# Altium PCB 7.09寸6色墨水屏.PcbDoc
Units mil, origin at the board's own origin, x right, y up, seen from the top; angles counter-clockwise.
Board outline 1424.8 x 1574.8 mil, 2 copper layers (Top Layer, Bottom Layer), stack 65.32 mil thick; 76 components, 61 nets, 235 pads, 282 vias.
Unrouted connection lines stored in the file: 32.
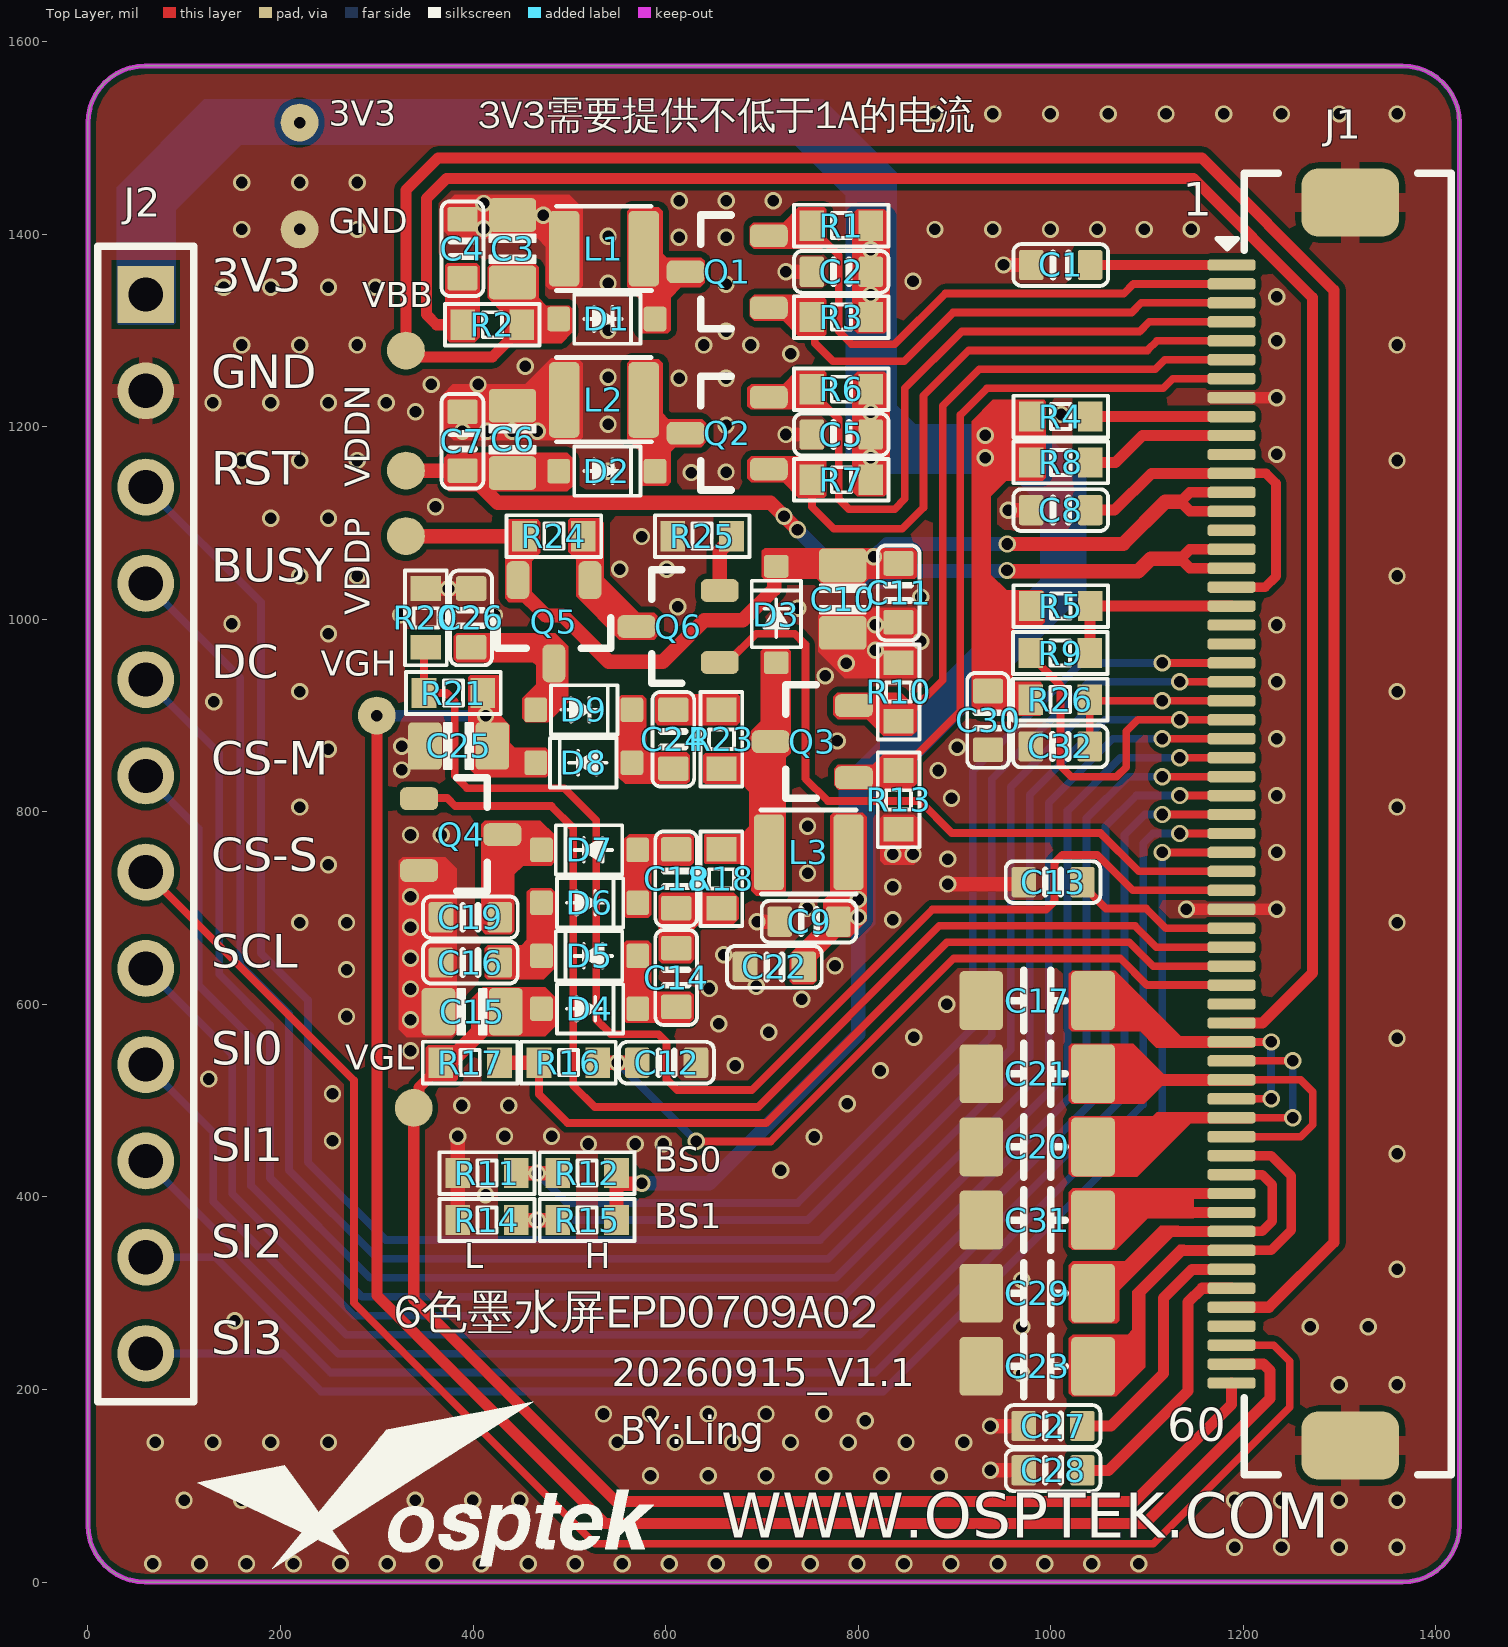
[diagram p0: Top Layer view]
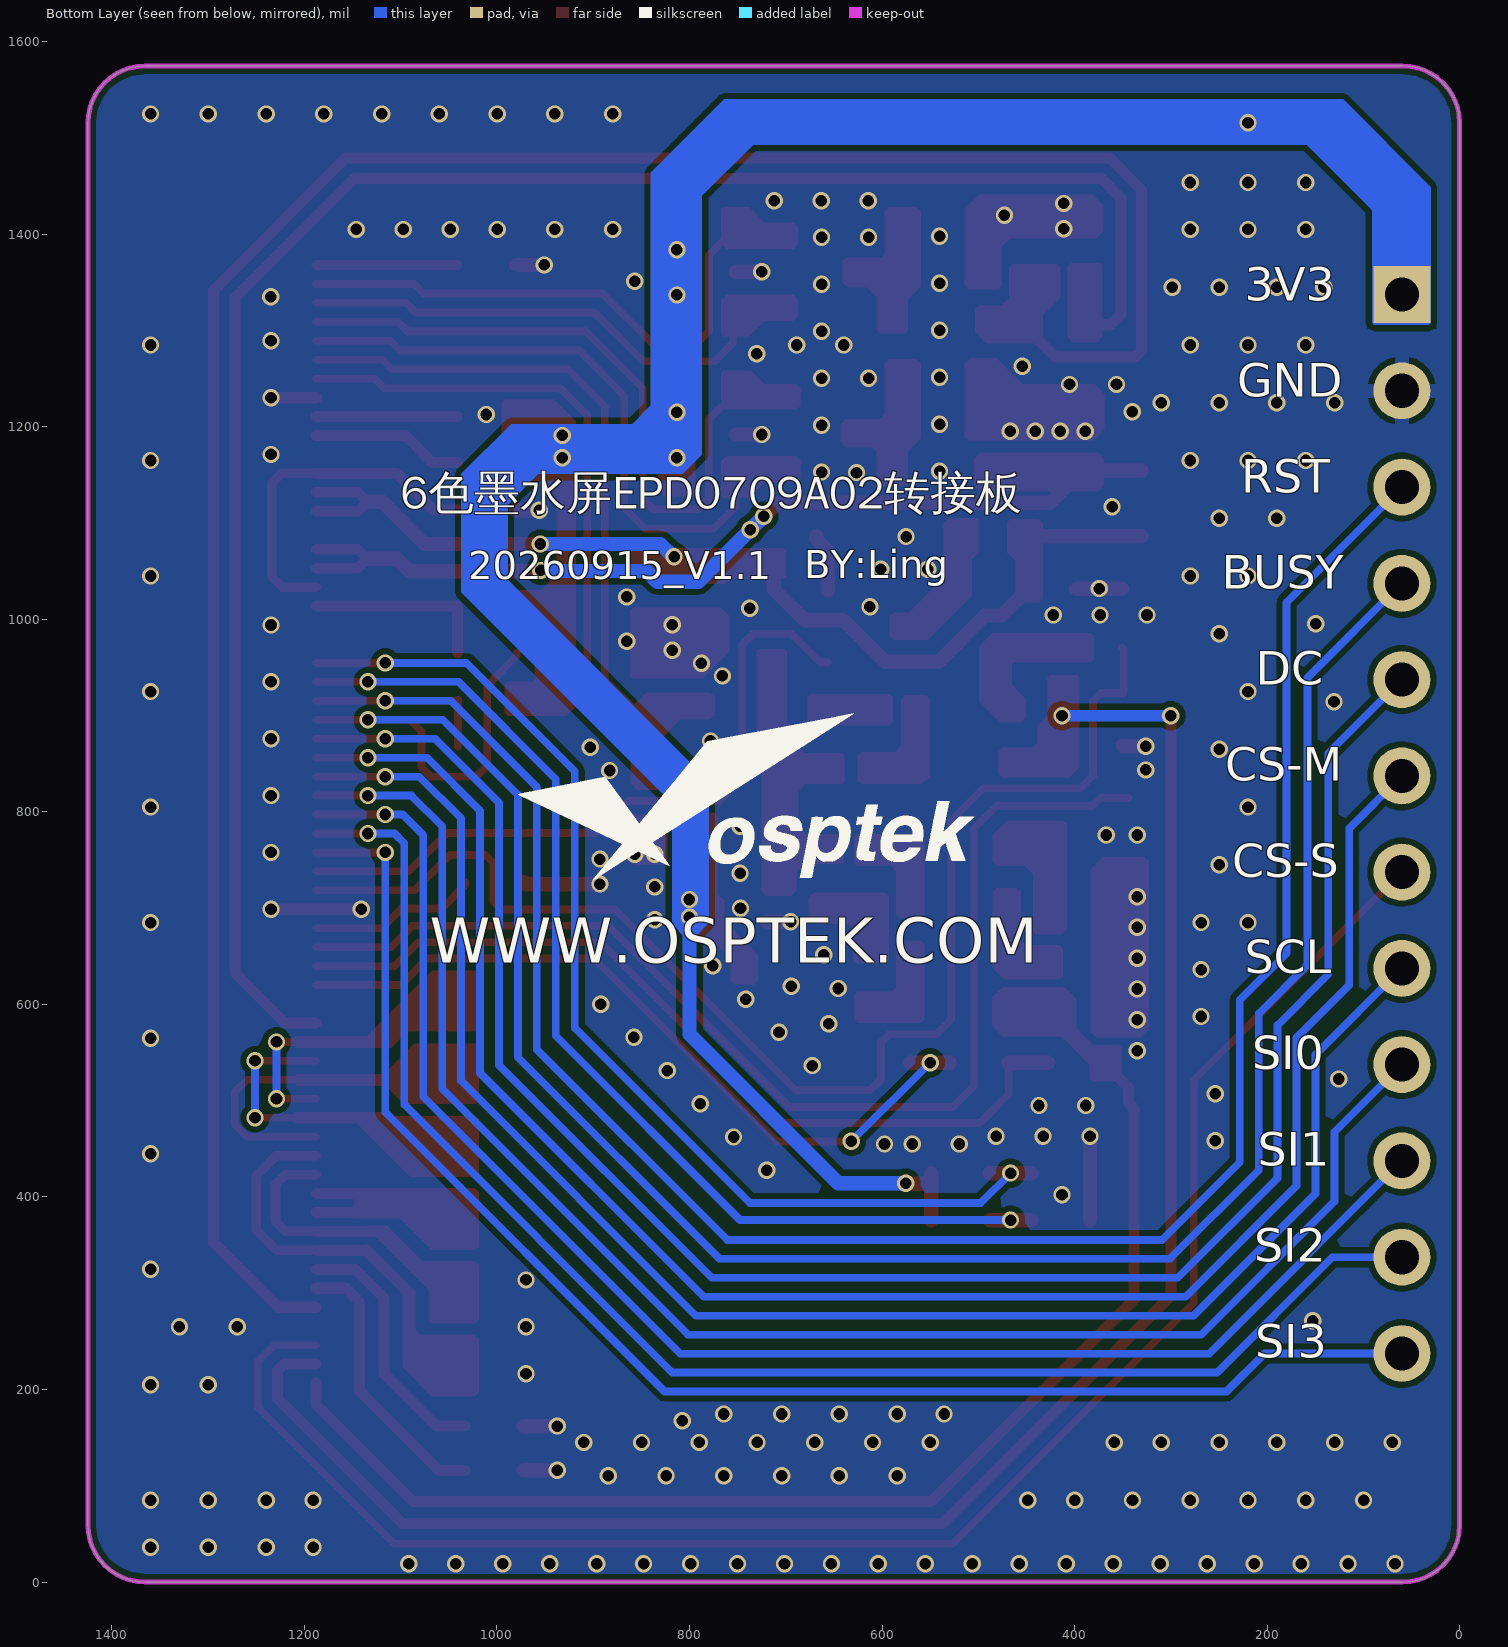
[diagram p1: Bottom Layer view, seen from below]

## Layer stack, top to bottom
Top Solder: solder mask 0.4, Solder Resist, Dk 3.5
Top Layer: signal copper 1.4
Dielectric 1: dielectric 62.5197, FR-4, Dk 4.8
Bottom Layer: signal copper 1.4
Bottom Solder: solder mask 0.4, Solder Resist, Dk 3.5

## Board outline
0,59.06 ccw(c59.06,59.06) 59.06,0 1365.75,0 ccw(c1365.75,59.06) 1424.8,59.06 1424.8,1515.75 ccw(c1365.75,1515.75) 1365.75,1574.8 59.06,1574.8 ccw(c59.06,1515.75) 0,1515.75

## Design rules (kind name [scope] priority, off if disabled: settings)
Clearance [All] p1: gap=6 ignorepadtopadclearanceinfootprint=TRUE except(0: Arc-Hole Track-Hole SMDPad-Hole THPad-Hole Via-Hole Fill-Hole Poly-Hole Region-Hole Text-Hole)
ComponentClearance [All] p1: gap=0 collisioncheckmode=3 verticalgap=0 showdistances=FALSE
HoleToHoleClearance [All] p1: gap=4 allowstackedmicrovias=TRUE
MinimumSolderMaskSliver [All] p1: minsoldermaskwidth=0
PlaneConnect [All] p1: pad.planeconnectstyle=Relief pad.reliefexpansion=20 pad.reliefentries=4 pad.reliefconductorwidth=10 pad.reliefairgap=10 via.planeconnectstyle=Direct via.reliefexpansion=20 via.reliefentries=4 via.reliefconductorwidth=10 via.reliefairgap=10
PolygonConnect [All] p1: thpad.connectstyle=Relief thpad.reliefconductorwidth=15 thpad.reliefentries=4 thpad.polygonreliefangle="90 Angle" thpad.airgapwidth=6 smdpad.connectstyle=Direct smdpad.reliefconductorwidth=10 smdpad.reliefentries=4 smdpad.polygonreliefangle="90 Angle" smdpad.airgapwidth=10 via.connectstyle=Direct via.reliefconductorwidth=10 via.reliefentries=4 via.polygonreliefangle="90 Angle" via.airgapwidth=10
RoutingVias [All] p1: holewidth=28 width=50 viastyle="Through Hole" minholewidth=11 minwidth=18 maxholewidth=28 maxwidth=50
SilkToSilkClearance [All] p1: silktosilkclearance=0
SilkToSolderMaskClearance [IsPad] p1: minsilkscreentomaskgap=0 clearancetoexposedcopper=TRUE
SolderMaskExpansion [All] p1: expansion=4 istentingtop=FALSE
Width [All] p1: maxlimit=100 minlimit=6 preferedwidth=6
24 further rules are at their usual default settings.

## Components (designator, comment, footprint, x,y, rotation, side; value= is the part's Value field where it differs from the comment)
C1 "25V/470nF" 0603-C 1010.47,1368.11 r180 top
C2 "22uF" 0603-C 782.53,1361 r0 top
C3 "25V 10uF" 0805-C 441,1385 r270 top
C4 "0.1uF" 0603-C 389,1385 r270 top
C5 "22uF" 0603-C 782.53,1192 r0 top
C6 "25V 10uF" 0805-C 441,1187 r270 top
C7 "0.1uF" 0603-C 389,1185 r270 top
C8 "22uF" 0603-C 1010.47,1113.46 r180 top
C9 "22uF" 0603-C 749,686 r0 top
C10 "25V 10uF" 0805-C 784,1021 r90 top
C11 "0.1uF" 0603-C 842,1027.53 r90 top
C12 "50V 1uF" 0603-C 601,539.47 r0 top
C13 "25V/470nF" 0603-C 1002.47,727 r180 top
C14 "25V/470nF" 0603-C 611,627.95 r90 top
C15 "50V 10uF" 0805-C 399,592.47 r0 top
C16 "50V 1uF" 0603-C 397.19,643.47 r0 top
C17 "25V/47uF" "1206/3216 C3" 985.95,604 r180 top
C18 "25V/470nF" 0603-C 611,730.47 r270 top
C19 "47nF" 0603-C 397.19,690.47 r0 top
C20 "25V/47uF" "1206/3216 C3" 985.95,452 r180 top
C21 "25V/47uF" "1206/3216 C3" 985.95,528 r180 top
C22 "22uF" 0603-C 713,639 r0 top
C23 "25V/47uF" "1206/3216 C3" 985.95,224 r180 top
C24 "25V/470nF" 0603-C 608,875.47 r90 top
C25 "25V 10uF" 0805-C 385,868.47 r0 top
C26 "25V/470nF" 0603-C 398,1001.47 r270 top
C27 "25V/470nF" 0603-C 1002.47,162 r180 top
C28 "25V/4.7uF" 0603-C 1002.47,116 r180 top
C29 "25V/47uF" "1206/3216 C3" 985.95,300 r180 top
C30 "22uF" 0603-C 935,895 r270 top
C31 "25V/47uF" "1206/3216 C3" 985.95,376 r180 top
C32 "0.1uF" 0603-C 1010,868 r0 top
D1 "SD103AWS" SOD-323 539,1312 r0 top
D2 "SD103AWS" SOD-323 539,1154 r0 top
D3 "SD103AWS" SOD-323 715,1005 r90 top
D4 "SD103AWS" SOD-323 521,595.47 r0 top
D5 "SD103AWS" SOD-323 521,650.42 r180 top
D6 "SD103AWS" SOD-323 521,705.53 r0 top
D7 "SD103AWS" SOD-323 521,760.47 r180 top
D8 "SD103AWS" SOD-323 515,851 r180 top
D9 "SD103AWS" SOD-323 515,906 r0 top
J1 "EPD0709A02" FPC0.5-60P 1254.8,787.4 r90 top locked
J2 "Pin HDR1X12" "Pin HDR1X12/2.54mm-S" 60,1337.4 r270 top locked
L1 "10uH" IND_CB2518_MM 536,1385 r0 top
L2 "10uH" IND_CB2518_MM 536,1228 r0 top
L3 "10uH" IND_CB2518_MM 748.66,758 r0 top
Q1 "AO3401" SOT-23-3 664,1361 r180 top
Q2 "AO3401" SOT-23-3 664,1193.4 r180 top
Q3 "AO3400" SOT-23-3 752.41,873 r180 top
Q4 "MMBT3904" SOT-23-3 387.25,776.4 r0 top
Q5 "MMBT3906" SOT-23-3 484,997.47 r270 top
Q6 "AO3400" SOT-23-3 613,992.53 r180 top
R1 "0.2R" 0603-R 782.54,1409 r0 top
R2 "0R" 0603-R 420,1306 r0 top
R3 "1M" 0603-R 782.54,1314 r0 top
R4 "0R" 0603-R 1010.47,1210.63 r180 top
R5 "0R" 0603-R 1010.47,1013.78 r180 top
R6 "0.2R" 0603-R 782.54,1239 r0 top
R7 "1M" 0603-R 782.54,1145 r0 top
R8 "0R" 0603-R 1010.47,1163 r180 top
R9 "10K" 0603-R 1010,965 r180 top
R10 "0.2R" 0603-R 842,924.53 r90 top
R11 "NC" 0603-R 414.47,424.79 r0 top
R12 "0R" 0603-R 518.47,424.79 r0 top
R13 "1M" 0603-R 842.02,812.47 r270 top
R14 "NC" 0603-R 414.47,376 r0 top
R15 "0R" 0603-R 518.47,376 r0 top
R16 "16K" 0603-R 499.01,539.47 r0 top
R17 "402K" 0603-R 396.99,539.47 r0 top
R18 "2.2R" 0603-R 658,730.47 r90 top
R20 "4.3K" 0603-R 351,1001.47 r90 top
R21 "110K" 0603-R 379.53,923.47 r180 top
R23 "2.2R" 0603-R 658,875.47 r270 top
R24 "100K" 0603-R 484,1086.47 r180 top
R25 "1.5K" 0603-R 638,1086.48 r0 top
R26 "10K" 0603-R 1010,916.62 r180 top

## Footprints (in the part's own frame and the unit in brackets; to place one, negate y for a bottom-side part, rotate by r counter-clockwise, add the part's x,y. Pads: shape width x height; smd on the part's side, far side on the other; paste and mask are expansions set on the pad)
0603-C [mm] "Murata & TDK 0603,25V,±10%,X7R,SERAMIC"
  rrect20% 0.65x0.8 smd paste+0 mask+0.051: 1(-0.775,0) 2(0.775,0)
  silkscreen extent -1.25,-0.55 1.25,0.55, body extent -0.8,-0.41 0.8,0.39, height 0.81
0603-R [mm]
  rect 0.65x0.8 smd paste+0 mask+0.051: 1(-0.775,0) 2(0.775,0)
  silkscreen extent -1.25,-0.55 1.25,0.55, body extent -0.8,-0.4 0.8,0.4, height 0.45
0805-C [mil]
  rrect25% 35x49.21 smd mask+0.5: 1(-35,0) 2(35,0)
  silkscreen extent -15,-24 15,24, body extent -39,-25 39,25, height 40
"1206/3216 C3" [mm]
  rrect20% 1.15x1.55 smd mask+0.051: 1(-1.475,0) 2(1.475,0)
  silkscreen extent -0.73,-0.8 0.73,0.8, body extent -1.6,-0.8 1.6,0.8, height 1.61
FPC0.5-60P [mm]
  rrect50% 1.8x2.58 smd: 0(-16.4,-1.432) 0(16.4,-1.432)
  rrect50% 0.3x1.27 smd mask+0.051: 1(14.75,1.7) 2(14.25,1.7) 3(13.75,1.7) 4(13.25,1.7) 5(12.75,1.7) 6(12.25,1.7) 7(11.75,1.7) 8(11.25,1.7) 9(10.75,1.7) 10(10.25,1.7) 11(9.75,1.7) 12(9.25,1.7) 13(8.75,1.7) 14(8.25,1.7) 15(7.75,1.7) 16(7.25,1.7) 17(6.75,1.7) 18(6.25,1.7) 19(5.75,1.7) 20(5.25,1.7) 21(4.75,1.7) 22(4.25,1.7) 23(3.75,1.7) 24(3.25,1.7) 25(2.75,1.7) 26(2.25,1.7) 27(1.75,1.7) 28(1.25,1.7) 29(0.75,1.7) 30(0.25,1.7) 31(-0.25,1.7) 32(-0.75,1.7) 33(-1.25,1.7) 34(-1.75,1.7) 35(-2.25,1.7) 36(-2.75,1.7) 37(-3.25,1.7) 38(-3.75,1.7) 39(-4.25,1.7) 40(-4.75,1.7) 41(-5.25,1.7) 42(-5.75,1.7) 43(-6.25,1.7) 44(-6.75,1.7) 45(-7.25,1.7) 46(-7.75,1.7) 47(-8.25,1.7) 48(-8.75,1.7) 49(-9.25,1.7) 50(-9.75,1.7) 51(-10.25,1.7) 52(-10.75,1.7) 53(-11.25,1.7) 54(-11.75,1.7) 55(-12.25,1.7) 56(-12.75,1.7) 57(-13.25,1.7) 58(-13.75,1.7) 59(-14.25,1.7) 60(-14.75,1.7)
  silkscreen extent -17.17,-4.1 17.17,2.09, body extent -17.1,-4.19 17.1,2.01, height 2.01
IND_CB2518_MM [mm]
  rrect30% 0.8x2 smd mask+0.051: 1(-1.05,0) 2(1.05,0)
  silkscreen extent -1.26,-1.1 1.25,1.12, body extent -1.25,-0.9 1.25,0.9, height 0.85
"Pin HDR1X12/2.54mm-S" [mm] "Connector; Header; 12 Position"
  rect 1.5x1.5 hole 0.9: 1(0,0)
  round 1.5 hole 0.9: 2(2.54,0) 3(5.08,0) 4(7.62,0) 5(10.16,0) 6(12.7,0) 7(15.24,0) 8(17.78,0) 9(20.32,0) 10(22.86,0) 11(25.4,0) 12(27.94,0)
  silkscreen extent -1.27,-1.27 29.21,1.27, body extent -1.27,-1.27 29.21,1.27, height 7.58
SOD-323 [mm] "塑封二极管"
  rrect25% 0.6x0.65 smd mask+0.051: 1(-1.27,0) 2(1.27,0)
  silkscreen extent -0.86,-0.65 0.89,0.65, body extent -1.25,-0.63 1.25,0.62, height 1
SOT-23-3 [mm]
  rrect50% 1x0.6 smd mask+0.051: 1(-1.099,0.95) 2(-1.099,-0.95) 3(1.098,0)
  silkscreen extent -0.1,-1.5 0.7,1.5, body extent -1.2,-1.5 1.2,1.5, height 1.05

## Part data
C1 C2 C3 C4 C5 C6 C7 C8 C9 C10 C11 C12 C13 C14 C15 C16 C17 C18 C19 C20 C21 C22 C23 C24 C25 C26 C27 C28 C29 C30 C31 C32: library part CAP, "Capacitor"
D1 D2 D3 D4 D5 D6 D7 D8 D9: library part DSK110
L1 L2 L3: library part INDUCTOR, "INDUCTOR"
Q1 Q2: "P沟道 30V/4.2A"
Q3 Q6: "N沟道 30V/4.2A"
Q4: library part NPN, "NPN Bipolar Transistor", Code_JEDEC=TO-226-AA, LatestRevisionDate=17-Jul-2002, LatestRevisionNote="Re-released for DXP Platform.", PackageDescription="TO, Flat Index; 3 In-Line, Axial Leads; Body Dia. 4.8mm; Leads 0.55 x 0.51 mm (max)", PackageReference=TO-226-AA, Published=8-Jun-2000, Publisher="Altium Limited"
Q5: library part PNP, "NPN Bipolar Transistor", Code_JEDEC=TO-226-AA, LatestRevisionDate=17-Jul-2002, LatestRevisionNote="Re-released for DXP Platform.", PackageDescription="TO, Flat Index; 3 In-Line, Axial Leads; Body Dia. 4.8mm; Leads 0.55 x 0.51 mm (max)", PackageReference=TO-226-AA, Published=8-Jun-2000, Publisher="Altium Limited"
R1 R2 R3 R4 R5 R6 R7 R8 R9 R10 R11 R12 R13 R14 R15 R16 R17 R18 R20 R21 R23 R24 R25 R26: library part Res2, "Resistor"

## Free pads (board coordinates)
  round 39.37 smd mask+2: 2(219.8,1405) 2(219.8,1516) 2(300,900) 2(330.28,1086.47) 2(330.28,1154.47) 2(330.28,1279.19) 2(338.41,492.49)

## Via types
v1: diameter 18, hole 12, Top Layer to Bottom Layer, tented both sides, 282 vias

## Nets (pads, with @x,y where several pads share a name; then routed paths per layer and width w, separated by ;. In a path a pad name is that pad's centre, name@x,y a point inside that pad or via, vN(x,y) a via of type N, cw(c..) or ccw(c..) an arc to the next point about the centre after c; other vN are vias at no path point)
+3V3: C2.2 C5.2 C9.2 C22.2 C30.1 J2.1 L3.2 pad.2@219.8,1516 R1.2 R3.2 R4.2 R5.2 R6.2 R7.2 R8.2 R12.2 R15.2 R26.2 | length 505.2
  Top Layer w15: R15.2 R12.2@549,411 ; R12.2 R12.2@549,411 ; v1(575.45,414.38) 574.87,413.81 551.81,413.81 R12.2@549,411
  Bottom Layer w15: v1(575.45,414.38) 645.38,414.38 800,569 v1(800,690.72) v1(800,709)
  other v1: 813,1168 932,1168 932,1191 813,1215 813,1337 813,1384 219.8,1516
AVDD: J1.9 R4.1 | length 146.9
  Top Layer w11.5: R4.1 J1.9
BS0: J1.22 R11.2 R12.1 | length 1165.7
  Top Layer w8: v1(1116,954.72) J1.22
  Top Layer w15: R11.2 v1(466.47,424.79) R12.1
  Bottom Layer w8: v1(466.47,424.79) 497.5,393.76 737.35,393.76 919.15,575.55 919.15,842.14 1031.73,954.72 v1(1116,954.72)
BS1: J1.23 R14.2 R15.1 | length 1152.1
  Top Layer w8: v1(1134,935.04) J1.23
  Top Layer w15: R14.2 v1(466.47,376) R15.1
  Bottom Layer w8: v1(466.47,376) 747.47,376 938.84,567.37 938.84,833.99 1039.89,935.04 v1(1134,935.04)
BUSY_N: J1.25 J2.4 R9.2 | length 2385
  Top Layer w8: R9.2 979.47,962.05 1010.21,931.31 1010.21,847.78 1021.55,836.44 1068.44,836.44 1078.45,846.45 1078.45,883.76 1090.36,895.67 v1(1134,895.67) J1.25
  Bottom Layer w8: J2.4 158.05,939.35 158.05,641.22 208.76,590.5 208.76,427.83 300.93,335.67 768.82,335.67 978.21,545.05 978.21,817.68 1056.19,895.67 v1(1134,895.67)
CSB_M: J1.27 J2.6 | length 1929.1
  Top Layer w8: v1(1134,856.3) J1.27
  Bottom Layer w8: J2.6 114.72,782.68 114.72,620.18 169.39,565.5 169.39,411.53 284.62,296.3 785.13,296.3 1017.58,528.74 1017.58,801.37 1072.5,856.3 v1(1134,856.3)
CSB_S: J1.58 J2.7 | length 1786.8
  Top Layer w8: J2.7 276.22,521.18 276.22,289.96 526.51,39.67 1106.61,39.67 1248.39,181.45 1248.39,229.23 1231.56,246.06 J1.58
DC_X: J1.26 J2.5 | length 2004.6
  Top Layer w8: v1(1116,875.98) J1.26
  Bottom Layer w8: J2.5 136.38,861.02 136.38,631.2 189.08,578.5 189.08,419.68 292.77,315.98 776.98,315.98 997.89,536.89 997.89,809.53 1064.35,875.98 v1(1116,875.98)
DRVN: J1.37 Q4.1 | length 1220.9
  Top Layer w8: Q4.1@343.82,814.4 373.14,814.4 381.55,806 481.4,806 504.19,783.22 504.19,515.62 526.4,493.41 696.11,493.41 884.3,681.6 1087.56,681.6 1109.71,659.45 J1.37
DRVN2: J1.40
DRVP_G: J1.33 Q6.1 | length 727.8
  Top Layer w8: Q6.1 664.12,955.13 694.05,985.06 734.01,985.06 745.25,973.82 745.25,834.59 768.46,811.39 864,811.39 897.31,778.07 1051.71,778.07 1091.59,738.19 J1.33
FBN: J1.38 R16.1 R17.2 | length 893.7
  Top Layer w8: R16.1 468.48,506.52 498.17,476.83 704.43,476.83 892.28,664.69 1081.72,664.69 1106.65,639.76 J1.38
  Top Layer w15: R17.2 R16.1
FBP: J1.34 R20.1 R21.2 | length 1386.9
  Top Layer w8: R20.1 349,968.95 R21.2 372.44,923.47 380.88,915.04 380.88,837.55 393.8,824.63 494.63,824.63 528.02,791.23 528.02,584.33 543.35,569 592.67,569 601,560.67 601,522 612,511 689.57,511 877.09,698.52 995.15,698.52 1003.98,707.35 1003.98,746.98 1012.27,755.27 1048.54,755.27 1085.31,718.5 J1.34
GDRC: J1.3 Q1.1 R3.1 | length 494.2
  Top Layer w8: R3.1 754.86,1311.15 754.86,1287.05 773.92,1267.99 847.92,1267.99 898.64,1318.71 1084.21,1318.71 1094.24,1328.74 J1.3
GDRN: J1.5 Q2.1 R7.1 | length 622.6
  Top Layer w8: R7.1 752.01,1116.87 774.86,1094.02 845.89,1094.02 867.81,1115.95 867.81,1232.37 914.79,1279.34 1100.52,1279.34 1110.55,1289.37 J1.5
GDRP: J1.7 Q3.1 R13.1 | length 694.9
  Top Layer w8: R13.1 844.97,843 906.19,904.22 906.19,1212.2 933.96,1239.97 1116.83,1239.97 1126.85,1250 J1.7
GND: C1.2 C2.1 C3.1 C4.1 C5.1 C6.1 C7.1 C8.2 C9.1 C10.1 C11.1 C12.2 C13.2 C15.1 C16.1 C17.2 C19.1 C20.2 C21.2 C22.1 C23.2 C25.1 C26.1 C27.2 C28.2 C29.2 C30.2 C31.2 C32.1 J1.0 J1.8 J1.35 J2.2 L1.1 L2.1 pad.2@219.8,1405 Q4.2 R10.2 R11.1 R13.2 R14.1 R20.2 R25.1 | length 576.9
  Top Layer w12: v1(1141.06,698.82) J1.35 v1(1234.69,698.82) ; J1.8 v1(1234.69,1230.31)
  Top Layer w15: v1(326,868) 349.53,868 C25.1 ; R20.2 C26.1 ; R14.1 R11.1 v1(383.94,462.94) ; v1(695,686) C9.1 ; v1(725,1192) C5.1 ; v1(725,1361) C2.1 ; v1@893.81,725 969.94,725 C13.2 ; v1(937.47,116) C28.2 ; v1(937.47,162) C27.2 ; v1(951,1368.11) C1.2 ; v1(956,1113.46) C8.2
  other v1: 67.1,18.84 115.89,18.84 164.67,18.84 213.46,18.84 262.24,18.84 311.03,18.84 359.81,18.84 408.6,18.84 457.38,18.84 506.17,18.84 554.95,18.84 603.74,18.84 652.52,18.84 701.31,18.84 750.1,18.84 798.88,18.84 847.67,18.84 896.45,18.84 945.24,18.84 994.02,18.84 1042.81,18.84 1091.59,18.84 1191.02,36.21 1239.8,36.21 1299.8,36.21 1359.8,36.21 99.8,85 159.8,85 219.8,85 279.8,85 339.8,85 399.8,85 448.59,85 1191.02,85 1239.8,85 1299.8,85 1359.8,85 584.3,110.5 644.3,110.5 704.3,110.5 764.3,110.5 824.3,110.5 884.3,110.5 69.8,145 129.8,145 189.8,145 249.8,145 309.8,145 358.59,145 549.8,145 609.8,145 669.8,145 729.8,145 789.8,145 849.8,145 909.8,145 807.47,167.53 535.51,174.5 584.3,174.5 644.3,174.5 704.3,174.5 764.3,174.5 1299.8,205 1359.8,205 969.8,216.21 969.8,265 1269.8,265 1329.8,265 152.5,271.5 969.8,313.79 1359.8,325 413,402.21 719.71,427.78 1359.8,445 519.85,454.98 568.64,454.98 597.42,454.98 254,458.43 754.21,462.28 432.73,462.94 481.52,462.95 388.21,495 437,495 788.7,496.78 254,507.21 125.5,522.5 823.2,531.27 672.5,536.5 335,552 1359.8,565 857.7,565.77 706.99,570.99 655.18,579.75 335,584 268.59,587.43 892.19,600.26 741.49,605.49 335,616 645.5,616.5 694.25,618.82 268.59,636.22 775.98,639.99 335,648 660.5,651.5 335,680 219.8,685 268.59,685 1359.8,685 836,688 747,700 335,712 836,722 893,725 747.46,736.2 249.8,745 893,751 836,756 857,756 1234.69,757.87 335,776 367,776 747.46,784.99 219.8,805 1359.8,805 897,814 1234.69,816.93 883,843 326,843.55 249.8,865 903,867 778.18,873.68 1234.69,875.98 130.5,914.5 219.8,925 1359.8,925 1234.69,935.04 765.78,941.17 787.56,954.24 818,968 865,977.15 249.8,985 818,994.28 1234.69,994.09 149.5,995.5 324.71,1004.5 373.5,1004.5 422.28,1004.5 737.5,1011.5 612.54,1012.94 865,1023.28 374.5,1032 219.8,1045 279.8,1045 1359.8,1045 552.51,1051.98 601.29,1051.98 575,1086 189.8,1105 249.8,1105 361,1117 626.5,1152.5 662.79,1153 540.21,1154 159.8,1165 219.8,1165 279.8,1165 1359.8,1165 1234.69,1171.26 388.99,1195.36 414.89,1195.36 440.79,1195.36 466.68,1195.36 662.79,1201.79 540.21,1202.78 1011,1212.79 340.21,1215.53 129.8,1225 189.8,1225 249.8,1225 309.8,1225 356.43,1244 405.21,1244 614,1250.57 662.78,1250.57 540.21,1251.57 454.21,1263 730,1276 159.8,1285 219.8,1285 279.8,1285 639.8,1285 688.59,1285 1359.8,1285 1234.69,1289.37 662.78,1299.36 540.21,1300.36 1235,1335.05 141.02,1345 189.8,1345 249.8,1345 298.59,1345 662.78,1348.14 540.21,1349.14 857,1351.21 614,1396.93 662.78,1396.93 540.21,1397.93 159.8,1405 219.8,1405 279.8,1405 879.8,1405 939.8,1405 999.8,1405 1048.59,1405 1097.37,1405 1146.16,1405 411.04,1405.87 472.81,1419.64 411.04,1432 614.21,1434.78 663,1434.79 711.79,1434.79 159.8,1453.79 219.8,1453.79 279.8,1453.79 879.8,1525 939.8,1525 999.8,1525 1059.8,1525 1119.8,1525 1179.8,1525 1239.8,1525 1299.8,1525 1359.8,1525
LX: D3.1 L3.1 Q3.3 R18.2 R23.2
NetC1_1: C1.1 J1.1 | length 146.9
  Top Layer w10: C1.1 J1.1
NetC13_1: C13.1 J1.36 | length 176.4
  Top Layer w8: C13.1 1033,724.05 1057.48,699.57 1099.27,699.57 1119.7,679.13 J1.36
NetC14_1: C14.1 D4.2 D5.1
NetC14_2: C14.2 C18.2 R18.1
NetC16_2: C16.2 D5.2 D6.1
NetC18_1: C18.1 D6.2 D7.1
NetC19_2: C19.2 D7.2 Q4.3
NetC24_1: C24.1 D8.1 D9.2
NetC24_2: C24.2 R23.1
NetC26_2: C26.2 D9.1 Q5.3
NetC27_1: C27.1 J1.54 | length 268.3
  Top Layer w11.5: C27.1 1062.55,162 1117.11,216.56 1117.11,295.04 1146.88,324.8 J1.54
NetC28_1: C28.1 J1.55 | length 287.3
  Top Layer w11.5: C28.1 1060.18,116 1142.65,198.47 1142.65,290.76 1157.01,305.12 J1.55
NetD1_K: D1.2 L1.2 Q1.3
NetD2_K: D2.2 L2.2 Q2.3
NetQ5_1: Q5.1 Q6.3 R24.1
NetQ6_2: Q6.2 R25.2 | length 61.6
  Top Layer w15: Q6.2 656.25,1071.24 668.53,1083.52 R25.2
REG_VGN: C12.1 J1.39 R16.2 | length 802.9
  Top Layer w8: v1(631.79,457.69) 709.15,457.69 899.23,647.77 1072.39,647.77 1100.08,620.08 J1.39
  Top Layer w15: R16.2 v1(550,539.47) C12.1
  Bottom Layer w8: v1(550,539.47) v1(631.79,457.69)
RESEC: J1.2 Q1.2 R1.1 | length 560.8
  Top Layer w8: R1.1 752.01,1406.05 779.8,1378.25 779.8,1299.24 793.18,1285.87 837.82,1285.87 890.36,1338.4 1076.06,1338.4 1086.08,1348.42 J1.2
RESEN: J1.4 Q2.2 R6.1 | length 685.7
  Top Layer w8: R6.1 752.01,1236.05 780,1208.05 780,1125 790.56,1114.44 837.85,1114.44 848.58,1125.17 848.58,1239.99 907.63,1299.03 1092.37,1299.03 1102.39,1309.05 J1.4
RESEP: J1.6 Q3.2 R10.1 | length 668.3
  Top Layer w8: R10.1 844.95,894 853.75,902.8 887.89,936.93 887.89,1221.74 925.8,1259.66 1108.67,1259.66 1118.7,1269.68 J1.6
RST_N: C32.2 J1.24 J2.3 R26.1 | length 2280.3
  Top Layer w8: C32.2 R26.1 1041.79,915.35 v1(1116,915.35) J1.24
  Bottom Layer w8: J2.3 179.72,1017.68 179.72,653.28 228.45,604.55 228.45,435.99 309.08,355.35 760.67,355.35 958.52,553.2 958.52,825.83 1048.04,915.35 v1(1116,915.35)
SCL: J1.28 J2.8 | length 1753.5
  Top Layer w8: v1(1116,836.61) J1.28
  Bottom Layer w8: J2.8 149.71,547.69 149.71,403.37 276.47,276.61 793.29,276.61 1037.26,520.59 1037.26,793.22 1080.65,836.61 v1(1116,836.61)
SI0: J1.29 J2.9 | length 1678
  Top Layer w8: v1(1134,816.93) J1.29
  Bottom Layer w8: J2.9 130.02,467.38 130.02,395.22 268.31,256.93 801.44,256.93 1056.94,512.43 1056.94,785.07 1088.81,816.93 v1(1134,816.93)
SI1: J1.30 J2.10 | length 1601.9
  Top Layer w8: v1(1116,797.24) J1.30
  Bottom Layer w8: J2.10 260.16,237.24 809.59,237.24 1076.63,504.28 1076.63,775.93 1097.94,797.24 v1(1116,797.24)
SI2: J1.31 J2.11 | length 1568.4
  Top Layer w8: v1(1134,777.56) J1.31
  Bottom Layer w8: J2.11 132.16,337.4 252.01,217.56 817.75,217.56 1096.32,496.13 1096.32,767.48 1106.39,777.56 v1(1134,777.56)
SI3: J1.32 J2.12 | length 1534.3
  Top Layer w8: v1(1116,757.87) J1.32
  Bottom Layer w8: J2.12 202.6,237.4 242.13,197.87 825.9,197.87 1116,487.97 v1(1116,757.87)
TSCL: J1.20
TSDA: J1.21
VBB_3P5V: C3.2 D1.1 J1.56 pad.2@330.28,1279.19 R2.2 | length 2464
  Top Layer w11.5: R2.2 450.53,1303.05 419.93,1272.45 337.02,1272.45 330.28,1279.19 330.28,1446.13 363.36,1479.21 1157.14,1479.21 1294.53,1341.83 1294.53,352.94 1227.02,285.43 J1.56
VCC1: C8.1 J1.12 J1.18 | length 360.6
  Top Layer w10: J1.18 1222.92,1033.46 1234.1,1044.64 1234.1,1141.23 1223.75,1151.57 J1.12
  Top Layer w11.5: C8.1 1066.46,1113.46 1104.57,1151.57 J1.12
VDD: J1.10 R8.1 | length 158.4
  Top Layer w11.5: R8.1 1067.24,1163 1095.19,1190.94 J1.10
VDDIO: J1.19 R5.1 R9.1 | length 195.2
  Top Layer w11.5: R9.1@1041,965.47 R5.1 J1.19
VDDN: C6.2 C7.2 D2.1 J1.16 J1.17 pad.2@330.28,1154.47 | length 996.3
  Top Layer w11: J1.17 1144.67,1053.15 1134.83,1062.99 1144.67,1072.83 J1.16
  Top Layer w15: pad.2@330.28,1154.47 C7.2 391.95,1154.47 425.43,1121 709,1121 v1(723,1107) v1(737,1093) ; v1@954.65,1050 1090.81,1050 1103.8,1062.99 1134.83,1062.99
  Bottom Layer w15: v1(723,1107) v1(737,1093) 790.81,1039.19 833.31,1039.19 844.31,1050.2 v1@954.65,1050.2
  other v1: 954.65,1050.77
VDDP: C10.2 C11.2 D3.2 J1.13 J1.14 pad.2@330.28,1086.47 Q5.2 R24.2 | length 940.7
  Top Layer w11: J1.14 1144.67,1112.2 1134.83,1122.05 1144.67,1131.89 J1.13
  Top Layer w15: pad.2@330.28,1086.47 R24.2 ; Q5.2 446.6,1032.85 475.45,1004 493,1004 541,956 597,956 640,999 680.3,999 712.65,1031.36 712.65,1052.65 D3.2 ; v1(955,1078.28) 1075.21,1078.28 1118.98,1122.05 1134.83,1122.05
  Bottom Layer w15: v1@816.81,1065 830.09,1078.28 v1(955,1078.28)
  other v1: 816,1065
VGH: C25.2 D8.2 J1.59 pad.2@300,900 R21.1 | length 1866.4
  Top Layer w11.5: v1(300,900) 300,297.86 536.89,60.98 1097.98,60.98 1227.82,190.82 1227.82,219.74 1221.08,226.47 J1.59@1187.97,226.47
  Bottom Layer w12: v1(300,900) v1(413,900)
VGL: C15.2 D4.1 J1.60 pad.2@338.41,492.49 R17.1 | length 1258
  Top Layer w11.5: R17.1 366.46,536.52 343.74,513.8 343.74,497.82 338.41,492.49 338.41,293.59 548.34,83.66 1087.2,83.66 1187.87,184.33 J1.60
VNCP_3P5V: C4.2 J1.41 R2.1 | length 1950
  Top Layer w11.5: R2.1 362.15,1306 351.7,1316.45 351.7,1437.26 372.23,1457.79 1148.27,1457.79 1272,1334.06 1272,632.69 1220.17,580.86 1188.03,580.86 J1.41
VSNH: C23.1 J1.48 J1.53 | length 428.7
  Top Layer w10: J1.53 1228.98,344.49 1250,365.51 1250,421.89 1228.98,442.91 J1.48
  Top Layer w11.5: C23.1 1077.96,224 1090.79,236.83 1090.79,299.79 1135.49,344.49 J1.53
VSNL: C29.1 J1.49 J1.52 | length 302.3
  Top Layer w10: J1.52 1219.61,364.17 1230,374.57 1230,412.84 1219.61,423.23 J1.49
  Top Layer w11.5: C29.1 1044.02,301.28 1060.91,318.17 1077.17,318.17 1123.17,364.17 J1.52
VSNL2: C31.1 J1.50 J1.51 | length 213.9
  Top Layer w11: J1.51 1144.67,383.86 1134.83,393.7 1144.67,403.54 J1.50
  Top Layer w15: C31.1 1044.02,378.56 1059.16,393.7 1134.83,393.7
VSPH: C17.1 J1.42 J1.45 | length 203.3
  Top Layer w8: J1.45 v1(1228.98,501.97) ; J1.42 v1(1228.98,561.02)
  Top Layer w11.5: 1125.81,561.02 J1.42
  Bottom Layer w8: v1(1228.98,501.97) v1(1228.98,561.02)
VSPL: C20.1 J1.43 J1.46 | length 186
  Top Layer w8: J1.46 v1(1251.34,482.28) ; J1.43 v1(1251.34,541.34)
  Bottom Layer w8: v1(1251.34,482.28) v1(1251.34,541.34)
VSPL2: C21.1 J1.44 J1.47 | length 275.1
  Top Layer w8: J1.47 1259.68,462.6 1272.23,475.16 1272.23,508.98 1259.56,521.65 J1.44
  Top Layer w11.5: 1125.81,521.65 J1.44
pads on no net: J1.11 J1.15 J1.57

## Polygon pours and split planes (outlines as drawn)
GND on Top Layer "NONET_L-01_P-001" (solid, remove dead copper, pour order 0): 0,59.06 ccw(c59.06,59.06) 59.06,0 1365.75,0 ccw(c1365.75,59.06) 1424.8,59.06 1424.8,1515.75 ccw(c1365.75,1515.75) 1365.75,1574.8 59.06,1574.8 ccw(c59.06,1515.75) 0,1515.75
GND on Bottom Layer "NONET_L-01_P-001" (solid, remove dead copper, pour order 1): 0,59.06 ccw(c59.06,59.06) 59.06,0 1365.75,0 ccw(c1365.75,59.06) 1424.8,59.06 1424.8,1515.75 ccw(c1365.75,1515.75) 1365.75,1574.8 59.06,1574.8 ccw(c59.06,1515.75) 0,1515.75

## Keep-outs
Keep-Out Layer:
  the board outline again, w5

## Other copper
Top Layer:
  region net VSPL: 1019,481 1022,484 1106,484 1110.16,488.16 1209.56,488.16 1209.56,476.46 1145.46,476.46 1090,421 1022.29,421 1019,424.29
  region net VSNH: 1080,257 1084.8,261.8 1084.8,302.11 1132.97,350.28 1139.22,350.28 1139.23,340.08 1098.02,298.87 1098.02,223.02 1068,193 1022.29,193 1019,196.29 1019,253 1023,257
  region net VSNL: 1077.17,333 1114.05,369.88 1132.83,369.88 1132.83,365 1071,303.17 1071,271.5 1068.5,269 1022.29,269 1019,272.29 1019,329 1023,333
  region net VSNL2: 1019,405 1023,409 1148.76,409 1148.76,378.09 1101.09,378.09 1068,345 1022.29,345 1019,348.29
  region net VSPL2: 1019,499.84 1021.84,497 1097,497 1115.75,515.75 1209.21,515.75 1209.21,527.56 1117.44,527.56 1086,559 1021.6,559 1019,556.4
  region net VSPH: 1019,575 1022,572 1093,572 1109.88,555.12 1209.56,555.12 1209.56,566.95 1135.05,566.95 1067,635 1022.29,635 1019,631.71
  region net +3V3: 764,687 729,652 729,624 732,621 753.41,621 757,624.59 757,646.8 779.89,669.68 791.68,669.68 809,687 809,735 809,795 805,799 774,799 771,796 771,715 764,708
  region net +3V3: 954,1144 938,1128 938,1046.2 954.2,1030 991,1030 994,1027 994,997 989.93,992.93 965.63,992.93 960.68,987.98 960.68,937.32 963,935 989,935 992,932 992,903 989,900 927.87,900 918,909.87 918,1146.84 918,1206 940,1228 993.13,1228 995,1226.13 995,1147 992,1144
  region net VDDP: 470,1069 461.2,1060.2 461.2,1022.33 456.86,1018 437.2,1018 433.2,1022 433.2,1100 437.2,1104 467,1104 470,1101
  region net GND: 323,574 331,566 378,566 383,571 383,741 371,753 327,753 323,749
  region net NetD2_K: 576,1139 573,1142 573,1174.56 560,1187.56 560,1266 564,1270 593,1270 597,1266 597,1214 603,1208 638,1208 643,1203 643,1185 637,1179 610,1179 605.28,1174.28 605.28,1142.28 602,1139
  region net GND: 377,1396 370,1403 370,1430 381,1441 500,1441 513.87,1427.13 513.87,1346.28 510.62,1343.02 478.98,1343.02 475.71,1346.29 475.71,1387.29 467,1396
  region net NetC14_1: 556,584 556,662.79 559.21,666 582,666 585,663 585,618 589.63,613.37 625.63,613.37 629,610 629,585 625,581 559,581
  region net NetC14_2: 635.38,683.94 630,678.57 630,647 626,643 596,643 593,646 593,712.94 596,715.94 671.05,715.94 676,710.99 676,689 670.94,683.94
  region net GND: 379,1244 454,1244 481,1271 509,1271 513.87,1266.13 513.87,1189.28 510.62,1186.02 379.98,1186.02 369,1197 369,1234
  region net LX: 725,717.88 725,855.97 730,860.97 730,967 728,969 701.18,969 699,966.82 699,894 687,882 687,868 680,861 641,861 639,859 639,831 641,829 679,829 687,821 687,785 679,777 641,777 640,776 640,747 641,746 680,746 689,737 689,718 694,713 720.12,713
  region net NetC26_2: 465.4,952.29 462.21,955.48 383.14,955.48 380.17,958.45 380.17,982.63 383.24,985.7 485.3,985.7 499,972 499,914 478.19,893.19 454.81,893.19 451,897 451,918 465.4,932.41
  region net +3V3: 794,1302 799,1297 827,1297 833,1303 833,1420 827,1426 799,1426 794,1421
  region net +3V3: 794,1133 799,1128 827,1128 833,1134 833,1251 827,1257 799,1257 794,1252
  region net VDDN: 370,1138 370,1168 375,1173 498,1173 504,1167 504,1139 498,1133 375,1133
  region net NetC24_2: 589,893 589,919 592,922 675,922 677,920 677,893 674,890 592,890
  region net NetC24_1: 551,836 551,918 554,921 576.51,921 580,917.51 580,869 587,862 622,862 625,859 625,832 622,829 558,829
  region net NetQ5_1: 499,1070 507,1062 507,1024 552,979 588,979 592,983 592,1003 588,1007 572,1007 536,1043 536,1100.18 531.18,1105 501,1105 499,1103
  region net GND: 758.78,966.22 758.78,1003.78 767,1012 859.03,1012 861.38,1009.64 861.38,940.38 860,939 786,939
  region net VDDP: 859,1042 811,1042 806,1037 762,1037 757,1042 702,1042 700,1044 700,1071 703,1074 857,1074 861,1070 861,1044
  region net VGH: 395,846 395,940 397,942 426,942 428,940 428,900.17 438.23,889.94 438.23,871.8 443.47,866.57 475.29,866.57 479.17,862.69 479.17,839.32 475.84,836 405,836
  region net RESEP: 774,919.73 778.27,924 845,924 861,908 861,883.91 855.91,878.82 826.17,878.82 809,896 779,896 774,901
  region net GDRP: 855,823 812,823 779.58,823 775,827.58 775,845 779,849 815,849 826,860 857.19,860 861,856.19 861,829
  region net GDRN: 689,1142.4 722,1142.4 738,1126.4 765,1126.4 767,1128.4 767,1164.4 762,1169.4 689,1169.4 685,1165.4 685,1146.4
  region net RESEN: 689,1244.4 722,1244.4 735.6,1258 765,1258 767,1256 767,1222.4 762.6,1218 688.4,1218 685,1221.4 685,1240.4
  region net NetD1_K: 576,1297 573,1300 573,1332.56 560,1345.56 560,1424 564,1428 593,1428 597,1424 597,1380 601.28,1375.72 637.28,1375.72 640.61,1372.39 640.61,1349.61 636,1345 616,1345 605.28,1334.28 605.28,1300.28 602,1297
  region net NetC18_1: 556,770.94 556,693 559.18,689.82 581.82,689.82 585,693 585,737.94 591,743.94 626,743.94 629,746.94 629,773.94 626,776.94 562,776.94
  region net NetC16_2: 412.39,628.58 412.39,658.39 415.39,661.39 450.41,661.39 456,666.97 456,717 459.84,720.84 481.16,720.84 485,717 485,637.45 473.52,625.97 415,625.97
  region net NetC19_2: 408.35,677.3 412.82,672.82 439.74,672.82 443,676.08 443,735 452,744 481,744 485,748 485,776 470,791 412.11,791 408.35,787.23
  region net RESEC: 691,1412 722,1412 738,1428 765,1428 767,1426 767,1390 762,1385 691.56,1385 687.5,1389.06 687.5,1408.5
  region net GDRC: 692,1310 722,1310 738,1294 765,1294 767,1296 767,1332 762,1337 692,1337 687.36,1332.36 687.36,1314.64
  region net VBB_3P5V: 433,1290 433,1316 415,1334 415,1365.91 418.09,1369 465,1369 468,1366 468,1334 476,1326 499.75,1326 503,1322.75 503,1298 492,1287 436,1287
  region net VNCP_3P5V: 371,1293 371,1368 373,1370 404,1370 407,1367 407,1293 402,1288 376,1288
  region net GND: 823,749 823,793.48 826.52,797 858,797 862.29,792.71 862.29,749.29 858,745 827,745
  region net VGL: 351,522 353,520 382,520 384,522 384,537 414.06,567.06 475.06,567.06 485.33,577.33 485.33,607.67 475,618 410,618 398,606 398,575 380.52,557.52 353.52,557.52 351,555
Bottom Layer:
  region net +3V3: 787,1440 734,1493 159,1493 91,1425 91,1308 89,1306 32,1306 30,1308 30,1449 121,1540 764,1540 840,1464 840,1222.18 859.31,1202.87 985.13,1202.87 1037,1151 1037,1028 818,809 818,683.31 804.69,670 794.66,670 780,684.66 780,832 989,1041 989,1119 957,1151 807,1151 787,1171

## Silkscreen, mask and mechanical layers (free items; w line width, h text height)
Top Overlay:
  drawing of 7 lines, arcs and shapes, not listed
  text "3V3" at 250,1503.85 h45
  text "3V3需要提供不低于1A的电流" at 405,1500.37 h50
  text "1" at 1136.97,1407.75 h60
  text "GND" at 250.03,1392.47 h45
  text "3V3" at 128,1328.75 h60
  text "VBB" at 285.03,1315.31 h45
  text "GND" at 128.04,1228.46 h60
  text "VDDN" at 301.69,1137.03 h45 r90
  text "RST" at 128.04,1128.13 h60
  text "BUSY" at 128.04,1027.79 h60
  text "VDDP" at 301.69,1004.03 h45 r90
  text "VGH" at 242.03,932.47 h45
  text "DC" at 128.04,927.46 h60
  text "CS-M" at 128.04,827.12 h60
  text "CS-S" at 128.04,726.79 h60
  text "SCL" at 128.04,626.45 h60
  text "SI0" at 128.04,525.96 h60
  text "VGL" at 267.03,523.47 h45
  text "SI1" at 128.04,425.63 h60
  text "BS0" at 588.03,417.47 h45
  text "BS1" at 588.03,358.47 h45
  text "SI2" at 128.04,325.29 h60
  text "L" at 391.03,317.31 h45
  text "H" at 516.03,317.31 h45
  text "6色墨水屏EPD0709A02" at 318,252.7 h60
  text "SI3" at 128.04,224.96 h60
  text "20260915_V1.1" at 544.03,193.28 h50
  text "60" at 1121,134.96 h60
  text "BY:Ling" at 553.03,133.2 h50
  text "WWW.OSPTEK.COM" at 658.06,30.61 h80
Bottom Overlay:
  drawing of 7 lines, arcs and shapes, not listed
  text "3V3" at 223,1319.75 h60
  text "GND" at 231.21,1219.93 h60
  text "RST" at 226.99,1120.11 h60
  text "6色墨水屏EPD0709A02转接板" at 1100,1103.62 h60
  text "BY:Ling" at 680.66,1032.6 h50
  text "20260915_V1.1" at 1029.66,1031.81 h50
  text "BUSY" at 246.96,1020.3 h60
  text "DC" at 211.83,920.48 h60
  text "CS-M" at 243.69,820.66 h60
  text "CS-S" at 236.33,720.85 h60
  text "WWW.OSPTEK.COM" at 1069.94,627.61 h80
  text "SCL" at 223.16,621.03 h60
  text "SI0" at 215.61,521 h60
  text "SI1" at 209.75,421.19 h60
  text "SI2" at 213.16,321.37 h60
  text "SI3" at 212.53,221.55 h60